# EAGLE board Matrix (EAGLE 8.5.2)

No outline drawn. Coordinates in mm, seen from the top.
Copper layers (1*16): Top 0.035mm / dielectric 1.5mm / Bottom 0.035mm
Design rules "default": minimum track width 10mil, minimum drill 24mil, track to track 8mil, track to pad 8mil, pad to pad 8mil, via to via 8mil, smd to smd 8mil, copper to edge 40mil, drill to drill 8mil, minimum pad ring 10mil, minimum via ring 8mil, stop-mask expansion 4mil, vias tented up to drill 0mil, thermal gap 10mil

## Footprints (pad centres in the part's own frame; a part is rotated, then mirrored left to right if it is on the bottom)
LP2C63-ST-RGB-SR0 = smd 1.3 x 1: 1 -3.25,1.6; 2 -3.25,0; 3 -3.25,-1.6; 4 3.25,-1.6; 5 3.25,0; 6 3.25,1.6 | smd 2 x 3: TH 0,0

## Placement (x,y rotation side)
E$1  [LP2C63-ST-RGB-SR0]  7.62,7.62 90 top
E$2  [LP2C63-ST-RGB-SR0]  16.51,7.62 90 top
E$3  [LP2C63-ST-RGB-SR0]  17.78,29.21 180 top
E$4  [LP2C63-ST-RGB-SR0]  12.7,48.26 270 top
E$5  [LP2C63-ST-RGB-SR0]  7.62,85.09 270 top
E$6  [LP2C63-ST-RGB-SR0]  7.62,98.81 0 top
E$7  [LP2C63-ST-RGB-SR0]  11.43,67.31 180 top
E$8  [LP2C63-ST-RGB-SR0]  26.67,98.81 0 top
E$10  [LP2C63-ST-RGB-SR0]  46.99,98.81 0 top
E$11  [LP2C63-ST-RGB-SR0]  66.04,98.81 0 top
E$12  [LP2C63-ST-RGB-SR0]  85.09,98.81 0 top
E$13  [LP2C63-ST-RGB-SR0]  104.14,98.81 0 top
E$14  [LP2C63-ST-RGB-SR0]  123.19,98.81 0 top
E$15  [LP2C63-ST-RGB-SR0]  142.24,98.81 0 top
E$16  [LP2C63-ST-RGB-SR0]  161.29,98.81 0 top
E$17  [LP2C63-ST-RGB-SR0]  180.34,98.81 0 top
E$18  [LP2C63-ST-RGB-SR0]  199.39,98.81 0 top
E$19  [LP2C63-ST-RGB-SR0]  218.44,98.81 0 top
E$20  [LP2C63-ST-RGB-SR0]  237.49,98.81 0 top
E$21  [LP2C63-ST-RGB-SR0]  256.54,98.81 0 top
E$22  [LP2C63-ST-RGB-SR0]  275.59,98.81 0 top

## Library data of the parts
E$1-E$8 E$10-E$22 = led

## Tracks (layer width: path | path; a pad name or v marks a point on that pad's centre or on a via)
(copper drawn outside any net)
  shapes: Bottom area x3, Top area x2